# EAGLE board draft9 (EAGLE 6.3), part 1 of 2
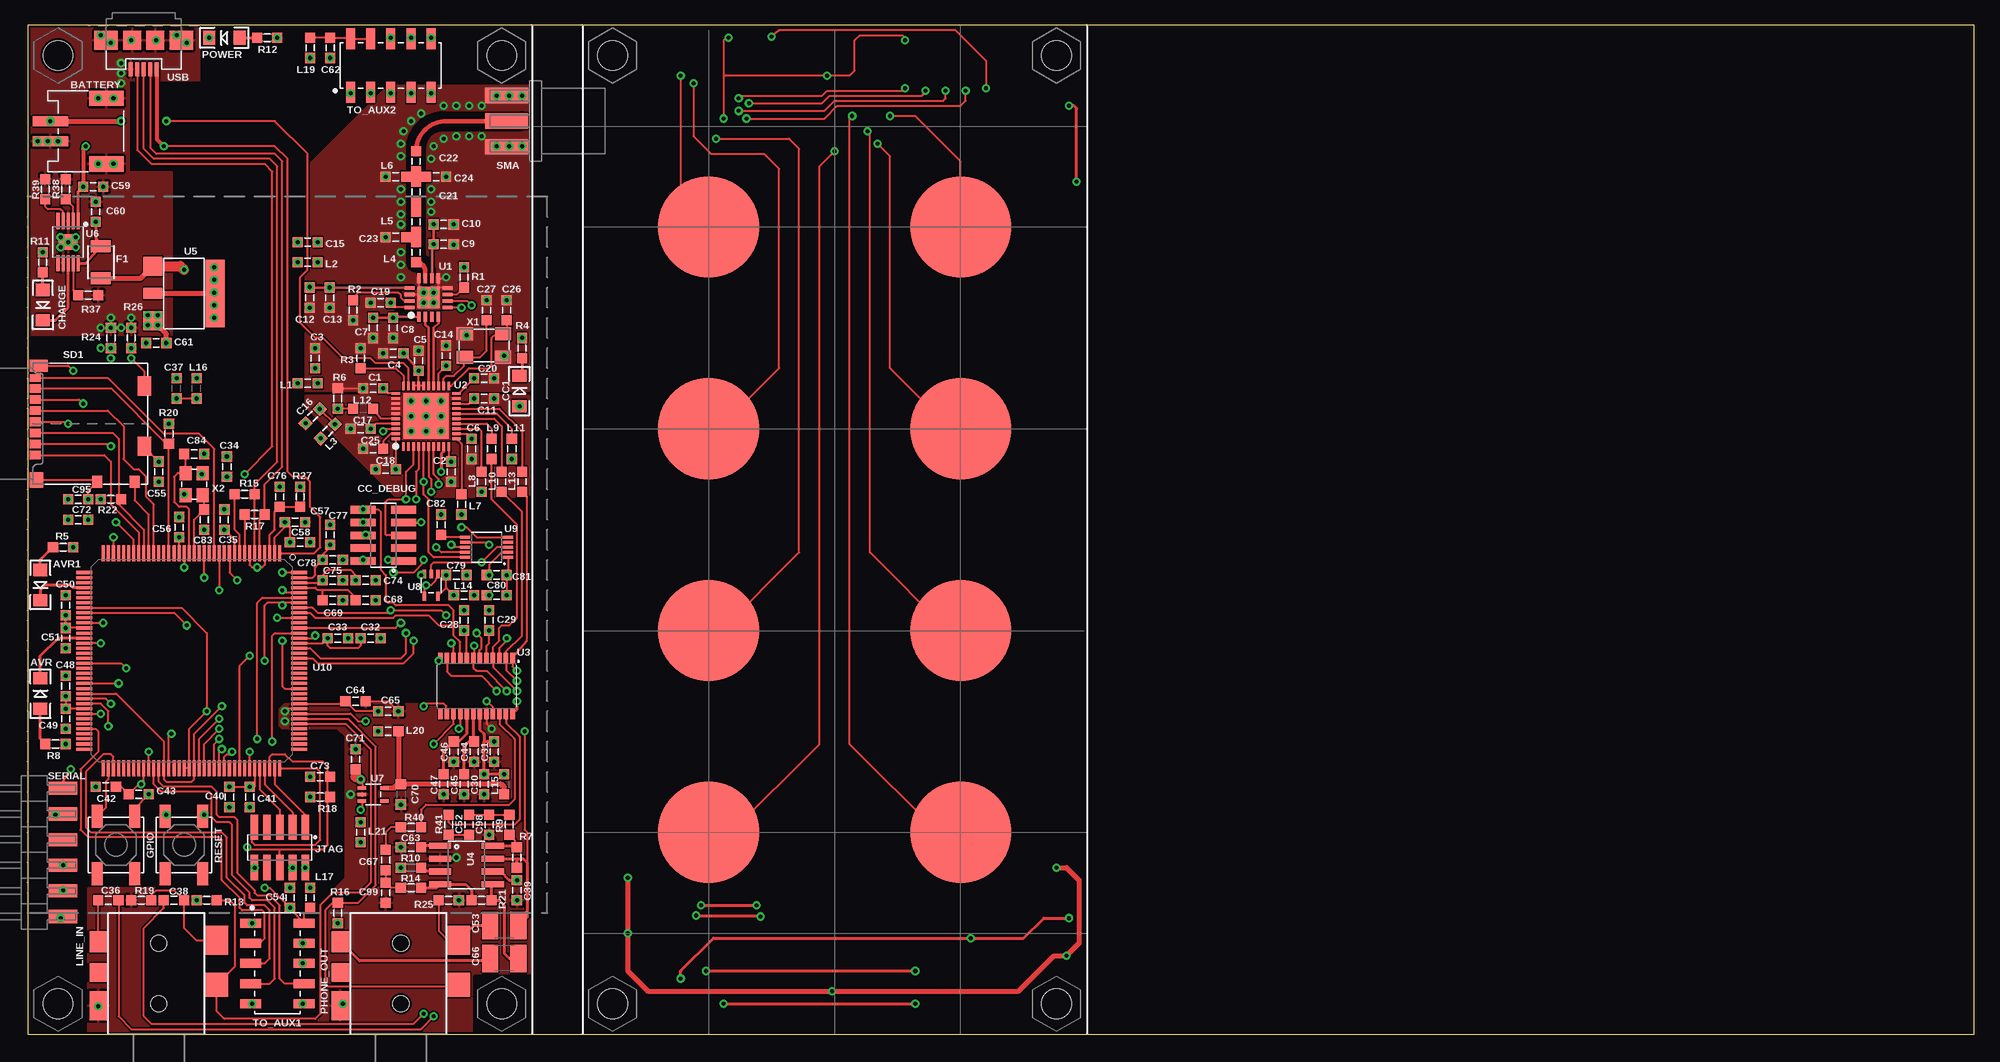
[diagram p0: board, top side]
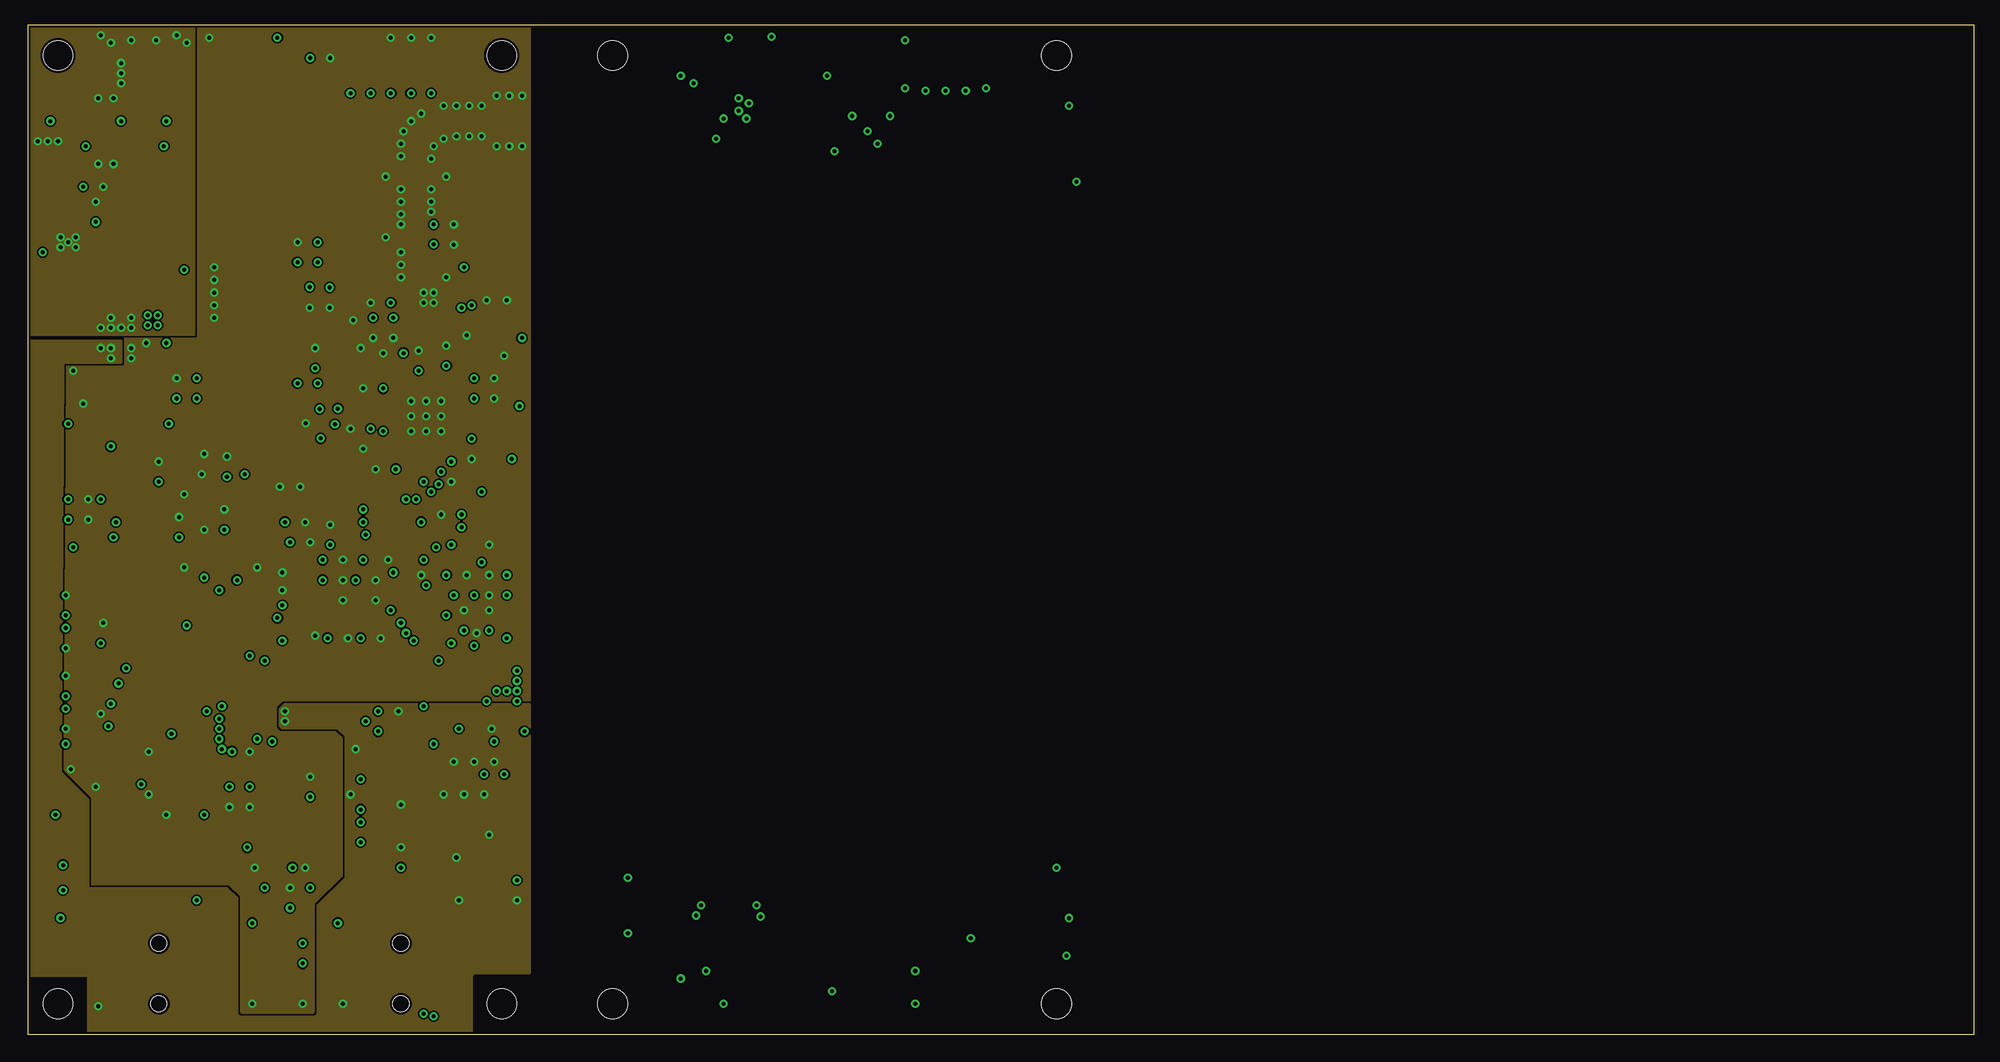
[diagram p1: board, inner layer Route2]
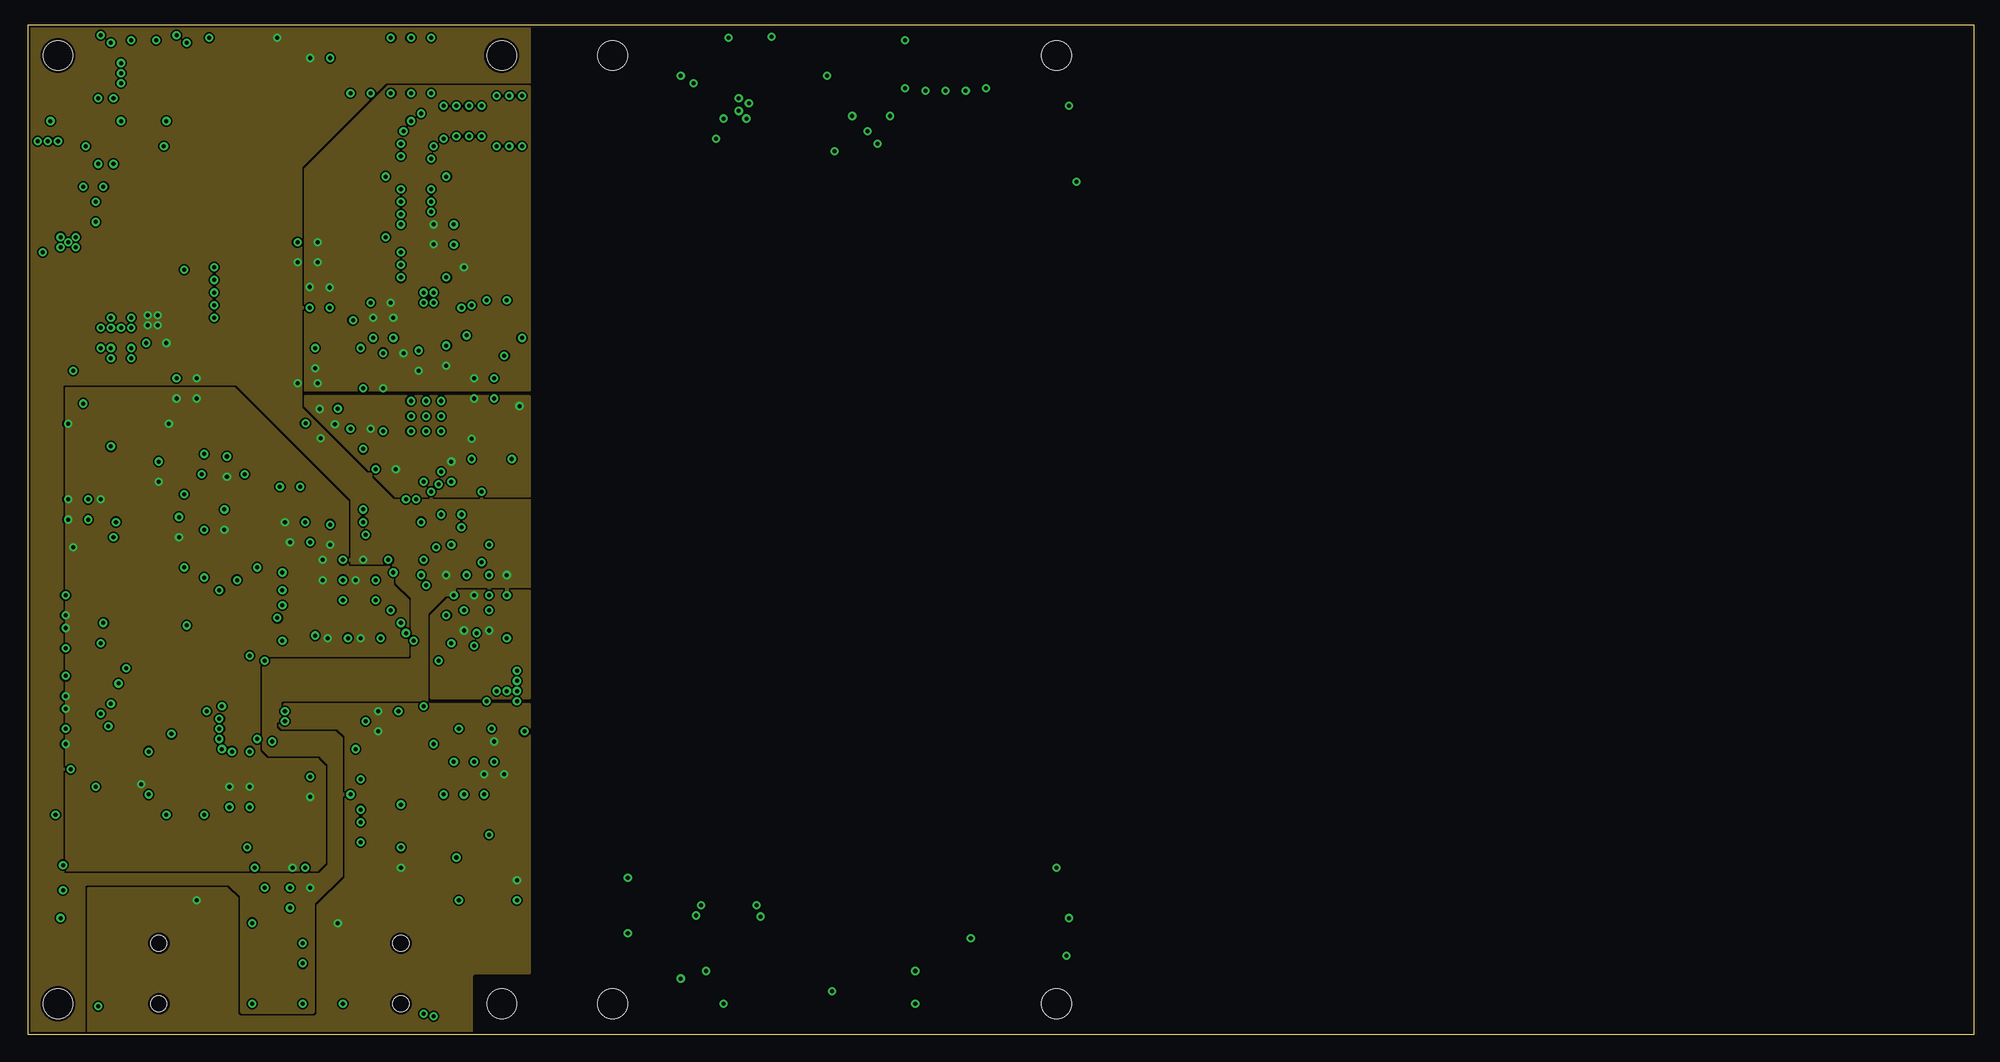
[diagram p2: board, inner layer Route3]
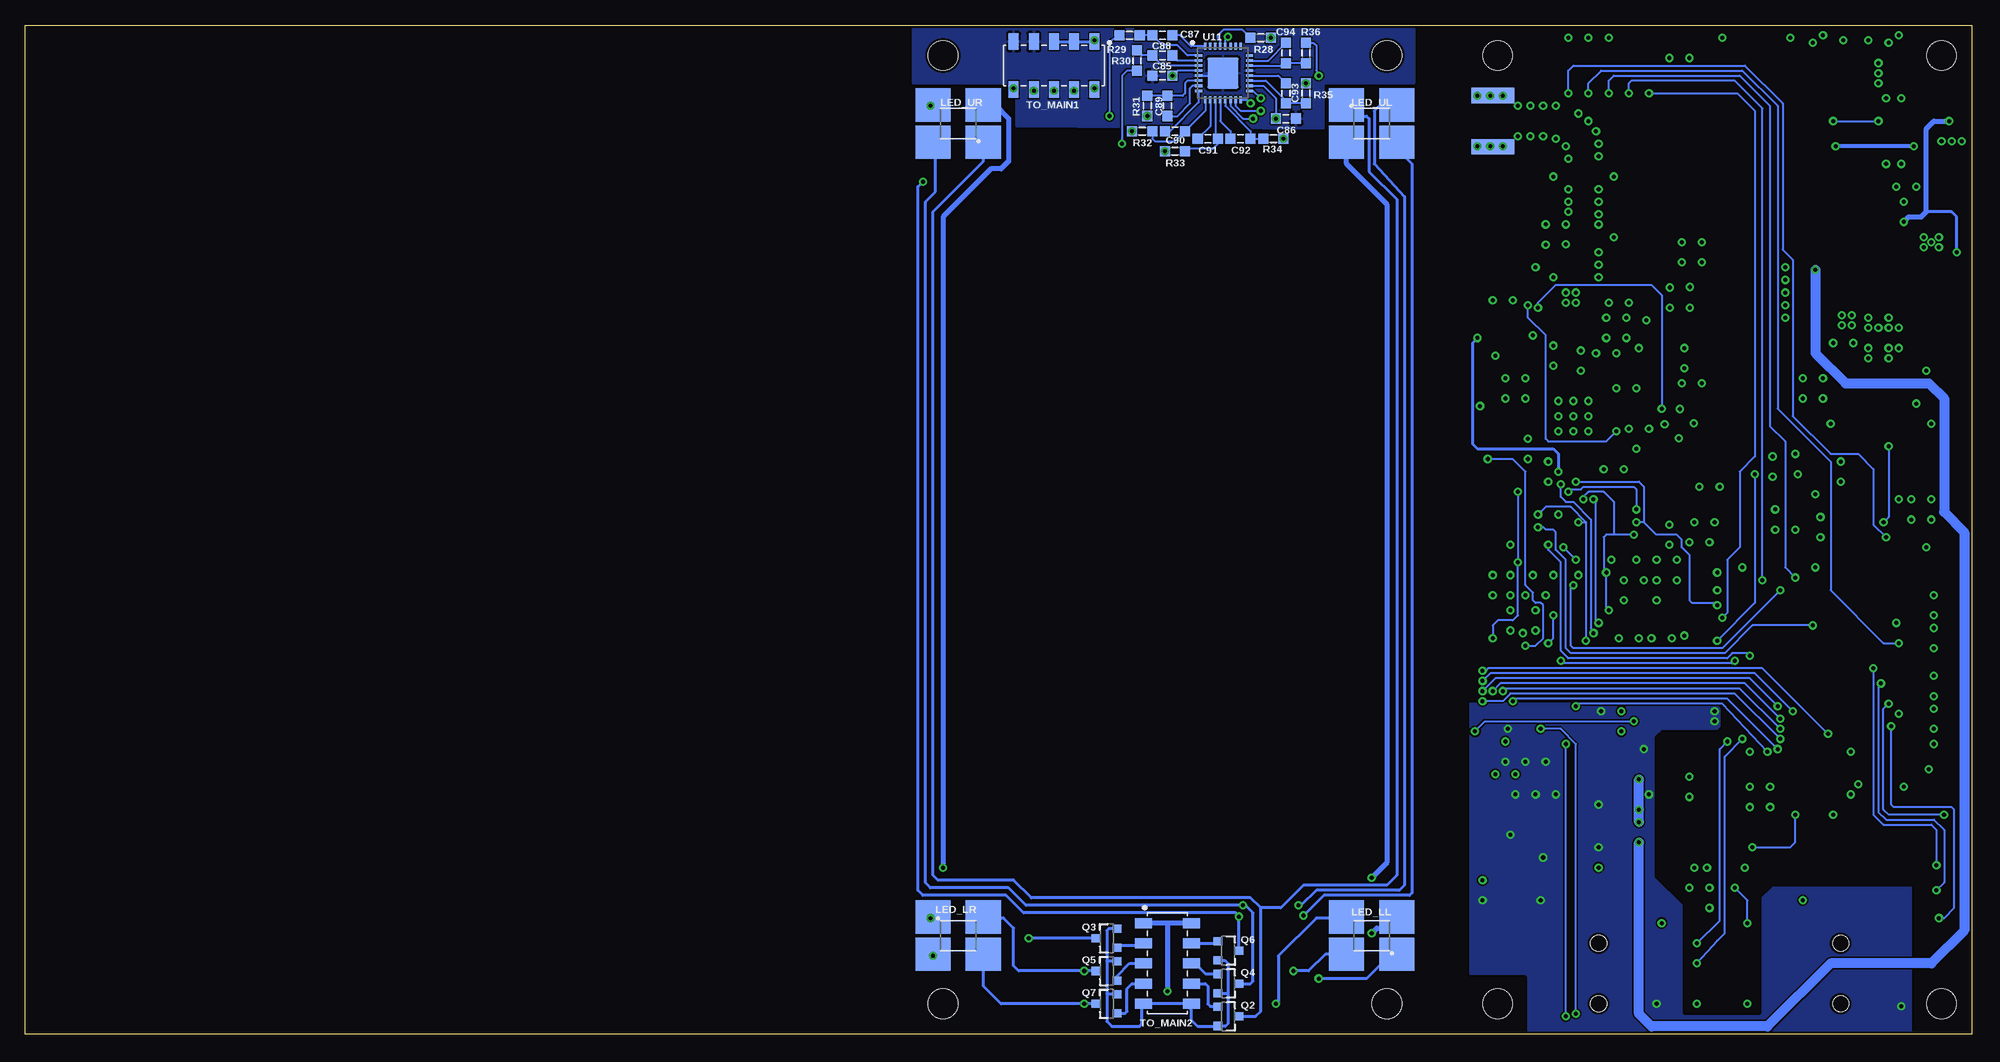
[diagram p3: board, bottom side, seen from below]

Size 193 x 100 mm. Coordinates in mm from the lower left corner, seen from the top.
Outline: 0,0 193,0 193,100 0,100 0,0
Copper layers (1+2*3+16): Top 0.034290625mm / dielectric 0.24891875mm / Route2 0.034290625mm / dielectric 39mil / Route3 0.034290625mm / dielectric 0.24891875mm / Bottom 0.034290625mm
Design rules "66each *": minimum track width 6mil, minimum drill 15mil, track to track 6mil, track to pad 6mil, pad to pad 6mil, via to via 6mil, smd to smd 0mil, copper to edge 10mil, drill to drill 10mil, minimum pad ring 10mil, minimum via ring 8mil, stop-mask expansion 4mil, vias tented up to drill 0mil, thermal gap 10mil
tRestrict: 7 lines

## Footprints (pad centres in the part's own frame; a part is rotated, then mirrored left to right if it is on the bottom)
LED-1206 = smd 1.2 x 1.4: A -1.5,0; C 1.5,0
1775469-2 = smd 1 x 3.5: + -1,-1.75; - 1,-1.75 | smd 1.5 x 3.4: X1 -3.25,3.8; X2 3.25,3.8
TOUCH-CIRCLE-10MM = smd 10 x 10: P$1 0,0
C0603 = smd 1 x 1: 1 -1,0; 2 1,0
C1210 = smd 1.6 x 2.7: 1 -1.4,0; 2 1.4,0
HEADER-10P-1.27MM = smd 0.75 x 2.5: 1 -2.54,-2; 2 -2.54,2; 3 -1.27,-2; 4 -1.27,2; 5 0,-2; 6 0,2; 7 1.27,-2; 8 1.27,2; 9 2.54,-2; 10 2.54,2
1210 = smd 1.2 x 2: 1 -1.6,0; 2 1.6,0
PTS-525 = smd 2.3 x 1.1: 1 -2.85,1.85; 2 2.85,1.85; 3 -2.85,-1.85; 4 2.85,-1.85
0603 = smd 1 x 1: 1 -1,0; 2 1,0
PLCC-4 = smd 1.5 x 1.1: 1 -1.5,0.75; 2 -1.5,-0.75; 3 1.5,-0.75; 4 1.5,0.75 | smd 3.5 x 3.3: 1-2 -2.5,1.85; 2-2 -2.5,-1.85; 3-2 2.5,-1.85; 4-2 2.5,1.85
STX-35332-5N = smd 1.75 x 2.1: 1 -6,9.15 | smd 1.75 x 1.8: 2 -6,6.1 | smd 2.25 x 2.4: 3 5.75,4.9 | smd 2.25 x 2.9: 4 5.75,9.3 | smd 1.75 x 2.9: 5 -6,2.8 | hole 1.6: 0,9; 0,3
SOT23-3 = smd 0.8 x 0.9: 1 -0.95,-1; 2 0.95,-1; 3 0,1.1
R0603 = smd 1 x 1: 1 -1,0; 2 1,0
MOLEX_104031-0811 = smd 0.85 x 1.1: CD/DAT3 2.005,0.25; CLK -1.295,0.25; CMD 0.905,0.25; DAT0 -3.495,0.25; DAT2 3.105,0.25; VDD -0.195,0.25; VSS -2.395,0.25 | smd 0.75 x 1.1: DAT1 -4.545,0.25 | smd 1.55 x 1.35: GND1 5.565,0.375 | smd 1.17 x 1.8: GND2 -5.755,0.6 | smd 1.9 x 1.35: GND3 -3.73,11.075; GND4 2.24,11.075 | smd 1.2 x 1: SWA 5.74,6.4; SWB 5.74,10.1
HEADER-3M-961-6P-2.54MM = smd 1.3 x 2.8: 1 -6.35,0; 2 -3.81,0; 3 -1.27,0; 4 1.27,0; 5 3.81,0; 6 6.35,0
CONREVSMA003.062 = smd 4.25 x 1.5 bottom: GND1 2.25,-2.54; GND3 2.25,2.54 | smd 4.25 x 1.5: GND2 2.25,-2.54; GND4 2.25,2.54; SIG 2.25,0
M22-63405 = smd 0.89 x 2.1: 1 -4,-2.65; 2 -4,2.65; 3 -2,-2.65; 4 -2,2.65; 5 0,-2.65; 6 0,2.65; 7 2,-2.65; 8 2,2.65; 9 4,-2.65; 10 4,2.65
M22-53205 = smd 1 x 1.65: 1 -4,-2.375; 2 -4,2.375; 3 -2,-2.375; 4 -2,2.375; 5 0,-2.375; 6 0,2.375; 7 2,-2.375; 8 2,2.375; 9 4,-2.375; 10 4,2.375
S-PVQFN-N16 = smd 1 x 0.35: 1 -1.9,0.975; 2 -1.9,0.325; 3 -1.9,-0.325; 4 -1.9,-0.975; 9 1.9,-0.975; 10 1.9,-0.325; 11 1.9,0.325; 12 1.9,0.975 | smd 0.35 x 1: 5 -0.975,-1.9; 6 -0.325,-1.9; 7 0.325,-1.9; 8 0.975,-1.9; 13 0.975,1.9; 14 0.325,1.9; 15 -0.325,1.9; 16 -0.975,1.9 | smd 2.16 x 2.16: GND 0,0
S-PVQFN-N40 = smd 0.85 x 0.28: 1 -3,2.25; 2 -3,1.75; 3 -3,1.25; 4 -3,0.75; 5 -3,0.25; 6 -3,-0.25; 7 -3,-0.75; 8 -3,-1.25; 9 -3,-1.75; 10 -3,-2.25; 21 3,-2.25; 22 3,-1.75; 23 3,-1.25; 24 3,-0.75; 25 3,-0.25; 26 3,0.25; 27 3,0.75; 28 3,1.25; 29 3,1.75; 30 3,2.25 | smd 0.28 x 0.85: 11 -2.25,-3; 12 -1.75,-3; 13 -1.25,-3; 14 -0.75,-3; 15 -0.25,-3; 16 0.25,-3; 17 0.75,-3; 18 1.25,-3; 19 1.75,-3; 20 2.25,-3; 31 2.25,3; 32 1.75,3; 33 1.25,3; 34 0.75,3; 35 0.25,3; 36 -0.25,3; 37 -0.75,3; 38 -1.25,3; 39 -1.75,3; 40 -2.25,3 | smd 4.5 x 4.5: GND 0,0
TSSOP-24L = smd 1.05 x 0.45: 1 -2.775,3.575; 2 -2.775,2.925; 3 -2.775,2.275; 4 -2.775,1.625; 5 -2.775,0.975; 6 -2.775,0.325; 7 -2.775,-0.325; 8 -2.775,-0.975; 9 -2.775,-1.625; 10 -2.775,-2.275; 11 -2.775,-2.925; 12 -2.775,-3.575; 13 2.775,-3.575; 14 2.775,-2.925; 15 2.775,-2.275; 16 2.775,-1.625; 17 2.775,-0.975; 18 2.775,-0.325; 19 2.775,0.325; 20 2.775,0.975; 21 2.775,1.625; 22 2.775,2.275; 23 2.775,2.925; 24 2.775,3.575
SO08 = smd 0.61 x 2.21: 1 -1.905,-2.616; 2 -0.635,-2.616; 3 0.635,-2.616; 4 1.905,-2.616; 5 1.905,2.616; 6 0.635,2.616; 7 -0.635,2.616; 8 -1.905,2.616
SOT-223 = smd 1.9 x 1.9: 1 -2.7,-3.1; 3 2.7,-3.1 | smd 1.1 x 1.9: 2 0,-3.1 | smd 6.7 x 1.9: 4 0,3.1
S-PDSO-G10 = smd 1.6 x 0.3: 1 -2.1,1; 2 -2.1,0.5; 3 -2.1,0; 4 -2.1,-0.5; 5 -2.1,-1; 6 2.1,-1; 7 2.1,-0.5; 8 2.1,0; 9 2.1,0.5; 10 2.1,1 | smd 1.57 x 1.88: GND 0,0
SOT-23-5 = smd 0.35 x 0.85: 1 -0.65,-1.1; 2 0,-1.1; 3 0.65,-1.1; 4 0.65,1.1; 5 -0.65,1.1
MSOP-10L = smd 1 x 0.305: 1 -2.125,1; 2 -2.125,0.5; 3 -2.125,0; 4 -2.125,-0.5; 5 -2.125,-1; 6 2.125,-1; 7 2.125,-0.5; 8 2.125,0; 9 2.125,0.5; 10 2.125,1
LQFP-144 = smd 1.6 x 0.3: 1 -10.65,8.75; 2 -10.65,8.25; 3 -10.65,7.75; 4 -10.65,7.25; 5 -10.65,6.75; 6 -10.65,6.25; 7 -10.65,5.75; 8 -10.65,5.25; 9 -10.65,4.75; 10 -10.65,4.25; 11 -10.65,3.75; 12 -10.65,3.25; 13 -10.65,2.75; 14 -10.65,2.25; 15 -10.65,1.75; 16 -10.65,1.25; 17 -10.65,0.75; 18 -10.65,0.25; 19 -10.65,-0.25; 20 -10.65,-0.75; 21 -10.65,-1.25; 22 -10.65,-1.75; 23 -10.65,-2.25; 24 -10.65,-2.75; 25 -10.65,-3.25; 26 -10.65,-3.75; 27 -10.65,-4.25; 28 -10.65,-4.75; 29 -10.65,-5.25; 30 -10.65,-5.75; 31 -10.65,-6.25; 32 -10.65,-6.75; 33 -10.65,-7.25; 34 -10.65,-7.75; 35 -10.65,-8.25; 36 -10.65,-8.75; 73 10.65,-8.75; 74 10.65,-8.25; 75 10.65,-7.75; 76 10.65,-7.25; 77 10.65,-6.75; 78 10.65,-6.25; 79 10.65,-5.75; 80 10.65,-5.25; 81 10.65,-4.75; 82 10.65,-4.25; 83 10.65,-3.75; 84 10.65,-3.25; 85 10.65,-2.75; 86 10.65,-2.25; 87 10.65,-1.75; 88 10.65,-1.25; 89 10.65,-0.75; 90 10.65,-0.25; 91 10.65,0.25; 92 10.65,0.75; 93 10.65,1.25; 94 10.65,1.75; 95 10.65,2.25; 96 10.65,2.75; 97 10.65,3.25; 98 10.65,3.75; 99 10.65,4.25; 100 10.65,4.75; 101 10.65,5.25; 102 10.65,5.75; 103 10.65,6.25; 104 10.65,6.75; 105 10.65,7.25; 106 10.65,7.75; 107 10.65,8.25; 108 10.65,8.75 | smd 0.3 x 1.6: 37 -8.75,-10.65; 38 -8.25,-10.65; 39 -7.75,-10.65; 40 -7.25,-10.65; 41 -6.75,-10.65; 42 -6.25,-10.65; 43 -5.75,-10.65; 44 -5.25,-10.65; 45 -4.75,-10.65; 46 -4.25,-10.65; 47 -3.75,-10.65; 48 -3.25,-10.65; 49 -2.75,-10.65; 50 -2.25,-10.65; 51 -1.75,-10.65; 52 -1.25,-10.65; 53 -0.75,-10.65; 54 -0.25,-10.65; 55 0.25,-10.65; 56 0.75,-10.65; 57 1.25,-10.65; 58 1.75,-10.65; 59 2.25,-10.65; 60 2.75,-10.65; 61 3.25,-10.65; 62 3.75,-10.65; 63 4.25,-10.65; 64 4.75,-10.65; 65 5.25,-10.65; 66 5.75,-10.65; 67 6.25,-10.65; 68 6.75,-10.65; 69 7.25,-10.65; 70 7.75,-10.65; 71 8.25,-10.65; 72 8.75,-10.65; 109 8.75,10.65; 110 8.25,10.65; 111 7.75,10.65; 112 7.25,10.65; 113 6.75,10.65; 114 6.25,10.65; 115 5.75,10.65; 116 5.25,10.65; 117 4.75,10.65; 118 4.25,10.65; 119 3.75,10.65; 120 3.25,10.65; 121 2.75,10.65; 122 2.25,10.65; 123 1.75,10.65; 124 1.25,10.65; 125 0.75,10.65; 126 0.25,10.65; 127 -0.25,10.65; 128 -0.75,10.65; 129 -1.25,10.65; 130 -1.75,10.65; 131 -2.25,10.65; 132 -2.75,10.65; 133 -3.25,10.65; 134 -3.75,10.65; 135 -4.25,10.65; 136 -4.75,10.65; 137 -5.25,10.65; 138 -5.75,10.65; 139 -6.25,10.65; 140 -6.75,10.65; 141 -7.25,10.65; 142 -7.75,10.65; 143 -8.25,10.65; 144 -8.75,10.65
QFN-32 = smd 0.7 x 0.25: 1 -2.4,1.75; 2 -2.4,1.25; 3 -2.4,0.75; 4 -2.4,0.25; 5 -2.4,-0.25; 6 -2.4,-0.75; 7 -2.4,-1.25; 8 -2.4,-1.75; 17 2.65,-1.75; 18 2.65,-1.25; 19 2.65,-0.75; 20 2.65,-0.25; 21 2.65,0.25; 22 2.65,0.75; 23 2.65,1.25; 24 2.65,1.75 | smd 0.25 x 0.7: 9 -1.75,-2.65; 10 -1.25,-2.65; 11 -0.75,-2.65; 12 -0.25,-2.65; 13 0.25,-2.65; 14 0.75,-2.65; 15 1.25,-2.65; 16 1.75,-2.65; 25 1.75,2.65; 26 1.25,2.65; 27 0.75,2.65; 28 0.25,2.65; 29 -0.25,2.65; 30 -0.75,2.65; 31 -1.25,2.65; 32 -1.75,2.65 | smd 3.1 x 3.1: GND 0,0
STANDOFF_3/16 = hole 2.946: 0,0
USB_MICRO_AB = smd 0.4 x 1.4: 1 -1.3,2.85; 2 -0.65,2.85; 3 0,2.85; 4 0.65,2.85; 5 1.3,2.85 | smd 2.3 x 1.9: GND1 -3.75,0; GND4 3.75,0 | smd 1.8 x 1.9: GND2 -1.15,0; GND3 1.15,0
ABM3C = smd 1.6 x 1.3: 1 -1.9,-1.15; 2 1.9,-1.15; 3 1.9,1.15; 4 -1.9,1.15
ABM8G = smd 1.4 x 1.2: GND-1 -1.1,0.85; GND-2 1.1,-0.85; X1 1.1,0.85; X2 -1.1,-0.85

## Placement (x,y rotation side)
AVR  [LED-1206]  1.25,33.75 90 top
AVR1  [LED-1206]  1.25,44.5 270 top
BATTERY  BATTERY-LIPO-JST  [1775469-2]  4,89.5 270 top
BUTTON  TOUCH_PAD-CIRCLE-10MM  [TOUCH-CIRCLE-10MM]  92.5,20 0 top
C1  100n  [C0603]  34.25,64 180 top
C2  100n  [C0603]  42,55.75 270 top
C3  2.2u  [C0603]  28.5,67 90 top
C4  100n_HF  [C0603]  36.25,67.5 180 top
C5  220p_HF  [C0603]  38.75,66.75 90 top
C6  100n  [C0603]  44,58 270 top
C7  1n  [C0603]  34.25,70 270 top
C8  10p  [C0603]  36.25,70 270 top
C9  18p  [C0603]  41.25,78.3 0 top
C10  1n  [C0603]  41.25,80.25 0 top
C11  100n  [C0603]  45.25,63 0 top
C12  1n  [C0603]  27.95,73 270 top
C13  10p  [C0603]  29.95,73 270 top
C14  100n  [C0603]  41.5,67.25 90 top
C15  2.2u  [C0603]  27.75,78.5 180 top
C16  2.2u  [C0603]  28.25,61.25 225 top
C17  100n  [C0603]  33,60 180 top
C18  1u  [C0603]  35.5,56 180 top
C19  1n  [C0603]  35,72.5 180 top
C20  100n  [C0603]  45.25,65 0 top
C21  6.8p_HF  [C0603]  38.5,83.5 90 top
C22  100p_HF  [C0603]  38.5,86.5 90 top
C23  1.2p_HF  [C0603]  36.5,79 180 top
C24  1.8p_HF  [C0603]  40.5,85 0 top
C25  1u  [C0603]  34.25,58 180 top
C26  27p  [C0603]  47.5,71.75 90 top
C27  27p  [C0603]  45.5,71.75 90 top
C28  1u  [C0603]  43.25,41 90 top
C29  100n  [C0603]  45.75,41 90 top
C30  100n  [C0603]  45.25,24.75 270 top
C31  1u  [C0603]  46.25,28 270 top
C32  1u  [C0603]  34,39.25 0 top
C33  1n  [C0603]  30.75,39.25 0 top
C34  1u  [C0603]  19.75,56.25 90 top
C35  1n  [C0603]  19.5,51 90 top
C36  470n  [C0603]  8,13.25 0 top
C37  2.2u  [C0603]  14.75,64 90 top
C38  470n  [C0603]  14.5,13.25 180 top
C39  100n  [C0603]  48.5,14.25 270 top
C40  1u  [C0603]  20,23.5 270 top
C41  1n  [C0603]  22,23.5 270 top
C42  1u  [C0603]  7.75,24.5 180 top
C43  1n  [C0603]  11,23.75 0 top
C44  100n  [C0603]  44.25,28 270 top
C45  10u  [C0603]  43.25,24.75 270 top
C46  100n  [C0603]  42.25,28 270 top
C47  10u  [C0603]  41.25,24.75 270 top
C48  1u  [C0603]  3.75,34.5 90 top
C49  1n  [C0603]  3.75,31.25 270 top
C50  1u  [C0603]  3.75,42.5 90 top
C51  1n  [C0603]  3.75,39.25 270 top
C52  1u  [C0603]  43.75,20.75 90 top
C53  220u  [C1210]  47.25,10.75 180 top
C54  2.2u  [C0603]  26,13.5 90 top
C55  1u  [C0603]  13,55.75 90 top
C56  1n  [C0603]  15,50.25 90 top
C57  1u  [C0603]  26.5,50.75 0 top
C58  1n  [C0603]  27,48.75 0 top
C59  10u  [C0603]  6.5,84 0 top
C60  10u  [C0603]  6.75,81.5 90 top
C61  10u  [C0603]  12.75,68.5 180 top
C62  2.2u  [C0603]  30,97.75 270 top
C63  1u  [C0603]  38,18.5 180 top
C64  100n  [C0603]  32.5,33 0 top
C65  1u  [C0603]  35.75,32 0 top
C66  220u  [C1210]  47.25,7.5 180 top
C67  1u  [C0603]  35.5,17.25 270 top
C68  1u  [C0603]  33.5,43 0 top
C69  1n  [C0603]  30.25,43 0 top
C70  10u  [C0603]  37,23.75 270 top
C71  1u  [C0603]  32.5,27.25 90 top
C72  1u  [C0603]  5,51 0 top
C73  100n  [C0603]  29,25.5 180 top
C74  1u  [C0603]  33.5,45 0 top
C75  1n  [C0603]  30.25,45 0 top
C76  10p  [C0603]  25,53.25 90 top
C77  1u  [C0603]  30,49.5 90 top
C78  1n  [C0603]  30.25,47 0 top
C79  100n  [C0603]  42.5,45.5 0 top
C80  1u  [C0603]  46.5,43.5 180 top
C81  100n  [C0603]  46.5,45.5 180 top
C82  100n  [C0603]  41,50.5 90 top
C83  10p  [C0603]  17.5,51 270 top
C84  10p  [C0603]  16.5,57.5 0 top
C85  100n  [C0603]  80.25,95 180 bottom
C86  100n  [C0603]  68,90.75 0 bottom
C87  10n  [C0603]  80.25,99 180 bottom
C88  10n  [C0603]  80.25,97 180 bottom
C89  10n  [C0603]  79.75,92 90 bottom
C90  10n  [C0603]  79,89.5 0 bottom
C91  10n  [C0603]  75.75,88.75 0 bottom
C92  10n  [C0603]  72.5,88.75 0 bottom
C93  10n  [C0603]  68,93.25 270 bottom
C94  10n  [C0603]  68,97.25 270 bottom
C95  100n  [C0603]  5,53 0 top
C98  470n  [C0603]  45.75,20.75 270 top
C99  470n  [C0603]  35.5,14 270 top
CC1  [LED-1206]  48.75,63.75 90 top
CC_DEBUG  HEADER-10P-SMD-MALE2  [HEADER-10P-1.27MM]  35.27,49.43 90 top
CHARGE  [LED-1206]  1.5,72.25 270 top
F1  2A  [1210]  7.25,76.5 270 top
GPIO  TACT_SWITCH-PTS-525  [PTS-525]  8.75,18.75 90 top
JTAG  HEADER-10P-SMD-MALE2  [HEADER-10P-1.27MM]  25,18.5 180 top
L1  BEAD_HF  [0603]  27.75,64.5 180 top
L2  BEAD_HF  [0603]  27.75,76.5 180 top
L3  BEAD  [0603]  29.75,59.75 225 top
L4  2.2n_HF  [0603]  38.5,77.5 90 top
L5  3.9n_HF  [0603]  38.5,80.5 90 top
L6  1.5n_HF  [0603]  36.5,85 0 top
L7  6.8n  [0603]  43,52.5 270 top
L8  6.8n  [0603]  45,54.75 90 top
L9  6.8n  [0603]  46,58 90 top
L10  6.8n  [0603]  47,54.75 90 top
L11  6.8n  [0603]  48,58 90 top
L12  6.8n  [0603]  33.25,62 180 top
L13  6.8n  [0603]  49,54.75 90 top
L14  BEAD  [0603]  43.25,43.5 180 top
L15  BEAD  [0603]  47.25,24.75 270 top
L16  BEAD  [0603]  16.75,64 90 top
L17  BEAD  [0603]  28,13.5 90 top
L19  BEAD  [0603]  28,97.75 270 top
L20  BEAD  [0603]  35.75,30 0 top
L21  BEAD  [0603]  33,20 270 top
LED_LL  LED_RGB  [PLCC-4]  59.5,9.75 180 bottom
LED_LR  LED_RGB  [PLCC-4]  100.5,9.75 0 bottom
LED_UL  LED_RGB  [PLCC-4]  59.5,90.25 0 bottom
LED_UR  LED_RGB  [PLCC-4]  100.5,90.25 180 bottom
LINE_IN  PHONE_SW-STX-35332-5N  [STX-35332-5N]  13,0 0 top
NEXT  TOUCH_PAD-CIRCLE-10MM  [TOUCH-CIRCLE-10MM]  92.5,60 0 top
PHONE_OUT  PHONE_SW-STX-35332-5N  [STX-35332-5N]  37,0 0 top
PLAY/PAUSE  TOUCH_PAD-CIRCLE-10MM  [TOUCH-CIRCLE-10MM]  67.5,80 0 top
POWER  [LED-1206]  19.5,98.75 180 top
PREV  TOUCH_PAD-CIRCLE-10MM  [TOUCH-CIRCLE-10MM]  67.5,60 0 top
Q2  2N7002  [SOT23-3]  73.75,1.75 270 bottom
Q3  2N7002  [SOT23-3]  85.75,9.5 90 bottom
Q4  2N7002  [SOT23-3]  73.75,5 270 bottom
Q5  2N7002  [SOT23-3]  85.75,6.25 90 bottom
Q6  2N7002  [SOT23-3]  73.75,8.25 270 bottom
Q7  2N7002  [SOT23-3]  85.75,3 90 bottom
R1  4.32K  [R0603]  43.25,75 90 top
R2  4.32K  [R0603]  32.25,71.75 90 top
R3  56.2K  [R0603]  33,67 270 top
R4  100  [R0603]  49,68 270 top
R5  100  [R0603]  3.5,48.25 0 top
R6  10K  [R0603]  30.75,63 270 top
R7  20K  [R0603]  48.5,17.5 90 top
R8  100  [R0603]  2.75,28.75 0 top
R9  20K  [R0603]  47.75,20.75 90 top
R10  10K  [R0603]  38,16.5 180 top
R11  332  [R0603]  1.5,76.5 90 top
R12  100  [R0603]  23.75,98.75 0 top
R13  1M  [R0603]  17.75,13.25 180 top
R14  20K  [R0603]  38,14.5 180 top
R15  39  [R0603]  21.5,53.5 0 top
R16  1M  [R0603]  30.75,12 270 top
R17  39  [R0603]  22.5,51.5 0 top
R18  10K  [R0603]  29,23.5 180 top
R19  100K  [R0603]  11.25,13.25 0 top
R20  100K  [R0603]  14,59.5 90 top
R21  20K  [R0603]  45,13.25 180 top
R22  100K  [R0603]  8.25,53 180 top
R24  0  [R0603]  8.25,69 270 top
R25  100K  [R0603]  41.75,13.25 180 top
R26  0  [R0603]  10.25,69 270 top
R27  6.81K  [R0603]  27,53.25 270 top
R28  100K  [R0603]  70.5,98.75 0 bottom
R29  4.64K  [R0603]  83.5,99 180 bottom
R30  4.64K  [R0603]  82.75,96.5 270 bottom
R31  4.64K  [R0603]  81.75,92 270 bottom
R32  4.64K  [R0603]  82.25,89.5 180 bottom
R33  4.64K  [R0603]  79,87.5 180 bottom
R34  4.64K  [R0603]  69.25,88.75 0 bottom
R35  4.64K  [R0603]  66,93.25 90 bottom
R36  4.64K  [R0603]  66,97.25 90 bottom
R37  10K  [R0603]  6,73.25 180 top
R38  681  [R0603]  3.75,83.75 270 top
R39  4.53K  [R0603]  1.75,83.75 270 top
R40  1K  [R0603]  38,20.5 0 top
R41  1K  [R0603]  41.75,20.75 90 top
RESET  TACT_SWITCH-PTS-525  [PTS-525]  15.5,18.75 270 top
SD1  MICROSD104031-0811  [MOLEX_104031-0811]  0.5,60.5 270 top
SERIAL  HEADER-6X1-961106-5500  [HEADER-3M-961-6P-2.54MM]  3.5,18 90 top
SMA  SMA-REVSMA-0.62  [CONREVSMA003.062]  49.75,90.5 180 top
STOP  TOUCH_PAD-CIRCLE-10MM  [TOUCH-CIRCLE-10MM]  92.5,80 0 top
TO_AUX1  HEADER-10P-SMD-2MM-FEMALE  [M22-63405]  24.75,7 270 top
TO_AUX2  HEADER-10P-SMD-2MM-FEMALE  [M22-63405]  36,96 0 top
TO_MAIN1  HEADER-10P-SMD-2MM-MALE  [M22-53205]  91,96 180 bottom
TO_MAIN2  HEADER-10P-SMD-2MM-MALE  [M22-53205]  79.75,7 270 bottom
U1  CC2591  [S-PVQFN-N16]  39.75,73 90 top
U2  CC85XX  [S-PVQFN-N40]  39.5,61.25 90 top
U3  CS4270-TSSOP24  [TSSOP-24L]  44.5,34.5 270 top
U4  LM4881  [SO08]  43.5,16.75 270 top
U5  [SOT-223]  15.5,73.42 270 top
U6  BQ2409XDGQ  [S-PDSO-G10]  4,78.5 270 top
U7  TLV700DDC  [SOT-23-5]  34.25,23.75 270 top
U8  SN74LVC1G80DBV  [SOT-23-5]  40,44.5 180 top
U9  CS2300-MSOP10L  [MSOP-10L]  45.5,48.25 180 top
U10  AT32UC3A3-LQFP-144  [LQFP-144]  16.25,37 270 top
U11  AT42QT1110-QFN-32  [QFN-32]  74.25,95.25 0 bottom
U$1  [STANDOFF_3/16]  3,3 0 top
U$2  [STANDOFF_3/16]  47,3 0 top
U$3  [STANDOFF_3/16]  47,97 0 top
U$4  [STANDOFF_3/16]  3,97 0 top
U$5  [UBBP01]  0,12 0 top
U$6  [STANDOFF_3/16]  58,97 0 top
U$7  [STANDOFF_3/16]  102,97 0 top
U$8  [STANDOFF_3/16]  58,3 0 top
U$9  [STANDOFF_3/16]  102,3 0 top
USB  USB_MICRO_AB  [USB_MICRO_AB]  11.5,98.5 180 top
VOL+  TOUCH_PAD-CIRCLE-10MM  [TOUCH-CIRCLE-10MM]  92.5,40 0 top
VOL-  TOUCH_PAD-CIRCLE-10MM  [TOUCH-CIRCLE-10MM]  67.5,40 0 top
WIRELESS  TOUCH_PAD-CIRCLE-10MM  [TOUCH-CIRCLE-10MM]  67.5,20 0 top
X1  48MHz  [ABM3C]  45.25,68.25 180 top
X2  12MHz  [ABM8G]  16.5,54.5 270 top

## Library data of the parts
AVR AVR1 CC1 CHARGE POWER = SparkFun-LED
BATTERY BUTTON C1-C36 C38-C69 C71-C95 C98 C99 CC_DEBUG F1 GPIO JTAG L1-L11 L13 L14 L17 L19-L21 LED_LL LED_LR LED_UL LED_UR LINE_IN NEXT PHONE_OUT PLAY/PAUSE PREV R1-R9 R11-R22 R24-R41 RESET SD1 SERIAL SMA STOP TO_AUX1 TO_AUX2 TO_MAIN1 TO_MAIN2 U1-U11 U$1-U$9 USB VOL+ VOL- WIRELESS X1 X2 = 00-EvaLibrary
C37 C70 R10 = rcl
L12 L15 L16 = SparkFun-Passives
Q2-Q7 = SparkFun-DiscreteSemi

## Nets
!AVR_LED0: AVR.C U10.50
!AVR_LED1: AVR1.C U10.40
!CHANGE: TO_AUX2.9 U10.34
!CS_CC8531: CC_DEBUG.5 U2.3 U10.133
!CS_CLOCK: U9.8 U10.100
!CS_CODEC: U3.11 U10.93
!CS_TOUCH: TO_AUX2.7 U10.51
!GPIO: GPIO.2 U10.74
!MUTE_L: U3.21 U10.96
!MUTE_R: U3.24 U10.95
!PAIR: U2.7 U10.129
!RESET: C73.1 JTAG.6 R18.1 RESET.1 U10.106
!RESET_CC8531: CC_DEBUG.7 L7.2 U10.127
!RESET_CODEC: U3.14 U10.97
!SD_CARD: SD1.SWB U10.27
A3.3V: C70.1 L15.2 L20.2 U7.5
AGND [Analog]: C30.2 C31.2 C39.2 C44.2 C45.2 C46.2 C47.2 C63.2 C64.2 C65.2 C70.2 C71.2 C98.2 C99.2 LINE_IN.5 PHONE_OUT.5 R19.1 R24.2 R25.1 U3.20 U4.2 U7.2 U10.117
ALL_GND [Power]: BATTERY.- BATTERY.X1 BATTERY.X2 C59.2 C60.2 R24.1 R26.1 R37.1 R38.1 R39.1 U6.3 U6.7 U6.GND USB.5 USB.GND1 USB.GND2 USB.GND3 USB.GND4
AUDIO: C53.1 R7.1 U4.7 U10.116
AUX_!CHANGE: TO_MAIN1.10 U11.28
AUX_BLUE_BOT: Q7.1 TO_MAIN2.7
AUX_BLUE_TOP: Q6.1 TO_MAIN2.4
AUX_CS: TO_MAIN1.8 U11.14
AUX_GREEN_BOT: Q5.1 TO_MAIN2.5
AUX_GREEN_TOP: Q4.1 TO_MAIN2.6
AUX_MISO: TO_MAIN1.4 U11.16
AUX_MOSI: TO_MAIN1.6 U11.15
AUX_RED_BOT: Q3.1 TO_MAIN2.3
AUX_RED_TOP: Q2.1 TO_MAIN2.8
AUX_SCLK: TO_MAIN1.2 U11.17
AUX_VDD: C85.1 C86.1 R28.2 TO_MAIN1.1 TO_MAIN1.3 TO_MAIN1.5 U11.4 U11.18
AUX_VDD2: LED_LL.2 LED_LL.2-2 LED_LR.2 LED_LR.2-2 LED_UL.2 LED_UL.2-2 LED_UR.2 LED_UR.2-2 TO_MAIN2.1 TO_MAIN2.2
AUX_VSS: C85.2 C86.2 TO_MAIN1.7 TO_MAIN1.9 U11.5 U11.21 U11.GND
AUX_VSS1: Q2.2 Q3.2 Q4.2 Q5.2 Q6.2 Q7.2 TO_MAIN2.9 TO_MAIN2.10
AVDD: C1.1 C3.1 C4.1 C5.1 C7.1 C8.1 C9.1 C10.1 C12.1 C13.1 C14.1 C15.1 C19.1 C20.1 L1.1 L2.1 R1.2 U1.1 U1.10 U1.13 U1.16 U2.20 U2.23 U2.26 U2.27 U2.28 U2.31
AVDD_CODEC: C30.1 C31.1 C39.1 C64.1 C65.1 L15.1 L20.1 R10.2 R13.2 R16.2 U3.19 U4.6 U10.118
AVR_VDD: C32.1 C33.1 C34.1 C35.1 C37.1 C40.1 C41.1 C42.1 C43.1 C48.1 C49.1 C50.1 C51.1 C55.1 C56.1 C57.1 C58.1 C72.1 C74.1 C75.1 C77.1 C78.1 C95.1 JTAG.4 L16.1 R5.2 R8.2 R18.2 R20.2 R22.2 SD1.VDD U10.2 U10.10 U10.21 U10.48 U10.64 U10.81 U10.103 U10.130 U10.142 U10.143
BAT [Power]: BATTERY.+ C60.1 F1.1 R11.2 U2.29 U6.10
BCLK: L9.1 U3.4 U10.61 U10.85 U10.91
BLUE_BOT: TO_AUX1.8 U10.84
BLUE_TOP: TO_AUX1.3 U10.68
CTS: SERIAL.5 U10.62
D3.3V: C61.1 C79.1 C80.1 C81.1 CC_DEBUG.2 L1.2 L2.2 L3.2 L14.2 L16.2 L17.2 L19.2 R12.2 U5.3 U8.5 U9.1
D+_UC: R15.2 U10.6 USB.3
D-_UC: R17.2 U10.5 USB.2
DAC0_N: U10.126
DAC0_P: U10.125
DAC1_N: U10.112
DAC1_P: U10.111
DGND: C1.2 C2.2 C3.2 C4.2 C5.2 C6.2 C7.2 C8.2 C9.2 C10.2 C11.2 C12.2 C13.2 C14.2 C15.2 C16.2 C17.2 C18.2 C19.2 C20.2 C23.2 C24.2 C25.2 C26.2 C27.2 C28.2 C29.2 C32.2 C33.2 C34.2 C35.2 C37.2 C40.2 C41.2 C42.2 C43.2 C48.2 C49.2 C50.2 C51.2 C54.2 C55.2 C56.2 C57.2 C58.2 C61.2 C62.2 C68.2 C69.2 C72.2 C73.2 C74.2 C75.2 C76.2 C77.2 C78.2 C79.2 C80.2 C81.2 C82.2 C83.2 C84.2 C95.2 CC_DEBUG.1 GPIO.4 JTAG.2 JTAG.10 L6.1 POWER.C R2.1 R3.1 R6.1 R26.2 R27.1 RESET.3 SD1.GND1 SD1.GND2 SD1.GND3 SD1.GND4 SD1.SWA SD1.VSS SERIAL.6 SMA.GND1 SMA.GND2 SMA.GND3 SMA.GND4 TO_AUX1.9 TO_AUX1.10 TO_AUX2.6 TO_AUX2.8 TO_AUX2.10 U1.8 U1.9 U1.12 U1.14 U1.GND U2.19 U2.32 U2.33 U2.34 U2.35 U2.GND U3.6 U5.2 U5.4 U8.3 U9.2 U9.7 U10.4 U10.7 U10.20 U10.47 U10.65 U10.82 U10.102 U10.131 U10.140 U10.144 X1.2 X1.4 X2.GND-1 X2.GND-2
DIN: L13.1 U3.1 U10.86
DOUT: L11.1 U3.7 U10.92
DVDD_CODEC: C28.1 C29.1 L14.1 U3.5 U3.8
GREEN_BOT: TO_AUX1.6 U10.139
GREEN_TOP: TO_AUX1.5 U10.75
IN_L: C38.1 LINE_IN.4 R19.2
IN_R: C36.1 LINE_IN.1
IOVDD: C2.1 C6.1 C11.1 C16.1 C17.1 C18.1 CC1.A L3.1 U2.10 U2.12 U2.18 U2.37 U2.40
LINEIN_SENSE: LINE_IN.3 R13.1 U10.114
LNA_EN: U1.6 U2.38
MCI-CLK: SD1.CLK U10.26
MCI-CMD: R22.1 SD1.CMD U10.28
MCI-DATA0: R20.1 SD1.DAT0 U10.23
MCI-DATA1: SD1.DAT1 U10.14
MCI-DATA2: SD1.DAT2 U10.29
MCI-DATA3: SD1.CD/DAT3 U10.30
MCLK: L8.1 U3.3 U8.2 U9.3
MISO0: CC_DEBUG.10 U2.6 U3.9 U10.136
MISO1: TO_AUX2.3 U10.11
MOSI0: CC_DEBUG.8 U2.5 U3.12 U9.10 U10.138
MOSI1: TO_AUX2.5 U10.16
N$1: C26.1 U2.21 X1.1
N$2: C27.1 U2.22 X1.3
N$3: L7.1 U2.11
N$4: L11.2 U2.16
N$5: L9.2 U2.14
N$6: C94.2 R36.1 U11.22
N$7: R2.2 U1.15
N$8: R1.1 U1.7
N$9: C22.2 SMA.SIG
N$10: AVR1.A R5.1
N$11: PLAY/PAUSE.P$1 R36.2
N$12: AVR.A R8.1
N$13: L4.1 U1.11
N$14: C23.1 L4.2 L5.1
N$15: C21.1 L5.2
N$16: C21.2 C22.1 C24.1 L6.2
N$17: C94.1 U11.23
N$18: L12.1 U2.36
N$19: R3.2 U2.30
N$20: C52.2 C98.1 R9.2
N$21: C25.1 U2.39
N$22: C71.1 L21.1 U7.1 U7.3
N$23: L8.2 U2.13
N$24: C67.2 C99.1 R14.2
N$25: L10.2 U2.15
N$26: C63.1 U4.1
N$27: L13.2 U2.17
N$28: R4.1 U2.9
N$29: CC1.C R4.2
N$30: C90.2 R32.1 U11.9
N$31: POWER.A R12.1
N$32: CHARGE.C U6.8
N$33: CHARGE.A R11.1
N$34: C68.1 C69.1 U10.141
N$35: U9.5 U10.45
N$39: R17.1 U10.8
N$40: C66.1 R21.1 U4.5
N$41: C91.2 R33.1 U11.11
N$42: C92.2 R34.1 U11.13
N$43: C87.2 R29.1 U11.1
N$44: R38.2 U6.2
N$45: C88.2 R30.1 U11.3
N$46: R15.1 U10.9
N$47: C76.1 R27.2 U10.3
N$49: C67.1 R40.1
N$50: F1.2 L21.2 U5.1
N$51: C52.1 R41.1
N$52: C83.1 U10.18 X2.X1
N$53: R7.2 R9.1 U4.8
N$54: R14.1 R21.2 U4.4
N$55: R10.1 U4.3
N$56: LED_UL.1 LED_UL.1-2 LED_UR.1 LED_UR.1-2 Q2.3
N$57: C84.1 U10.19 X2.X2
N$58: LED_UL.4 LED_UL.4-2 LED_UR.4 LED_UR.4-2 Q4.3
N$59: C87.1 U11.32
N$60: C90.1 U11.8
N$61: R32.2 VOL+.P$1
N$62: C91.1 U11.10
N$63: R33.2 WIRELESS.P$1
N$64: C92.1 U11.12
N$65: R34.2 VOL-.P$1
N$66: R37.2 U6.9
N$67: C54.1 L17.1 TO_AUX1.1 TO_AUX1.2
N$69: R39.2 U6.4
N$71: C93.2 R35.1 U11.19
N$72: PREV.P$1 R35.2
N$76: C93.1 U11.20
N$77: R28.1 U11.29
N$78: LED_UL.3 LED_UL.3-2 LED_UR.3 LED_UR.3-2 Q6.3
N$79: LED_LL.1 LED_LL.1-2 LED_LR.1 LED_LR.1-2 Q3.3
N$80: LED_LL.4 LED_LL.4-2 LED_LR.4 LED_LR.4-2 Q5.3
N$83: LED_LL.3 LED_LL.3-2 LED_LR.3 LED_LR.3-2 Q7.3
N$84: C62.1 L19.1 TO_AUX2.2 TO_AUX2.4
N$85: R29.2 STOP.P$1
N$86: C88.1 U11.2
N$87: NEXT.P$1 R30.2
N$88: C46.1 C47.1 U3.17
N$89: C44.1 C45.1 U3.18
N$90: C89.2 R31.1 U11.6
N$91 [Analog]: C36.2 U3.15
N$92 [Analog]: C38.2 U3.16
N$93: C89.1 U11.7
N$94: C82.1 U9.6
N$95: BUTTON.P$1 R31.2
OUT_L: R41.2 U3.23
OUT_R: R40.2 U3.22
PA_EN: L12.2 R6.2 U1.5
PHONE_L: C53.2 PHONE_OUT.4 R25.2
PHONE_R [Analog]: C66.2 PHONE_OUT.1
PHONE_SENSE: PHONE_OUT.3 R16.1 U10.115
RED_BOT: TO_AUX1.4 U10.132
RED_TOP: TO_AUX1.7 U10.83
RF_N: U1.2 U2.25
RF_P: U1.4 U2.24
RTS: SERIAL.1 U10.63
RXD: SERIAL.3 U10.55
SCLK0: CC_DEBUG.6 U2.4 U3.10 U9.9 U10.137
SCLK1: TO_AUX2.1 U10.135
TCK: JTAG.1 U10.107
TDI: JTAG.9 U10.108
TDO: JTAG.3 U10.105
TMS: JTAG.5 U10.104
TXD: SERIAL.2 U10.59
UC_MCLK: U8.1 U8.4 U10.13
USBOTGID: U10.121 USB.4
VBUS [Power]: C59.1 U6.1 U10.1 USB.1
WCLK: L10.1 U3.2 U10.44 U10.89 U10.90